# Altium PCB PCB1.PcbDoc
Units mil, origin at the board's own origin, x right, y up, seen from the top; angles counter-clockwise.
Board outline 6000 x 4000 mil, 2 copper layers (Top Layer, Bottom Layer); 29 components, 30 nets, 132 pads, 3 vias.
Unrouted connection lines stored in the file: 6.
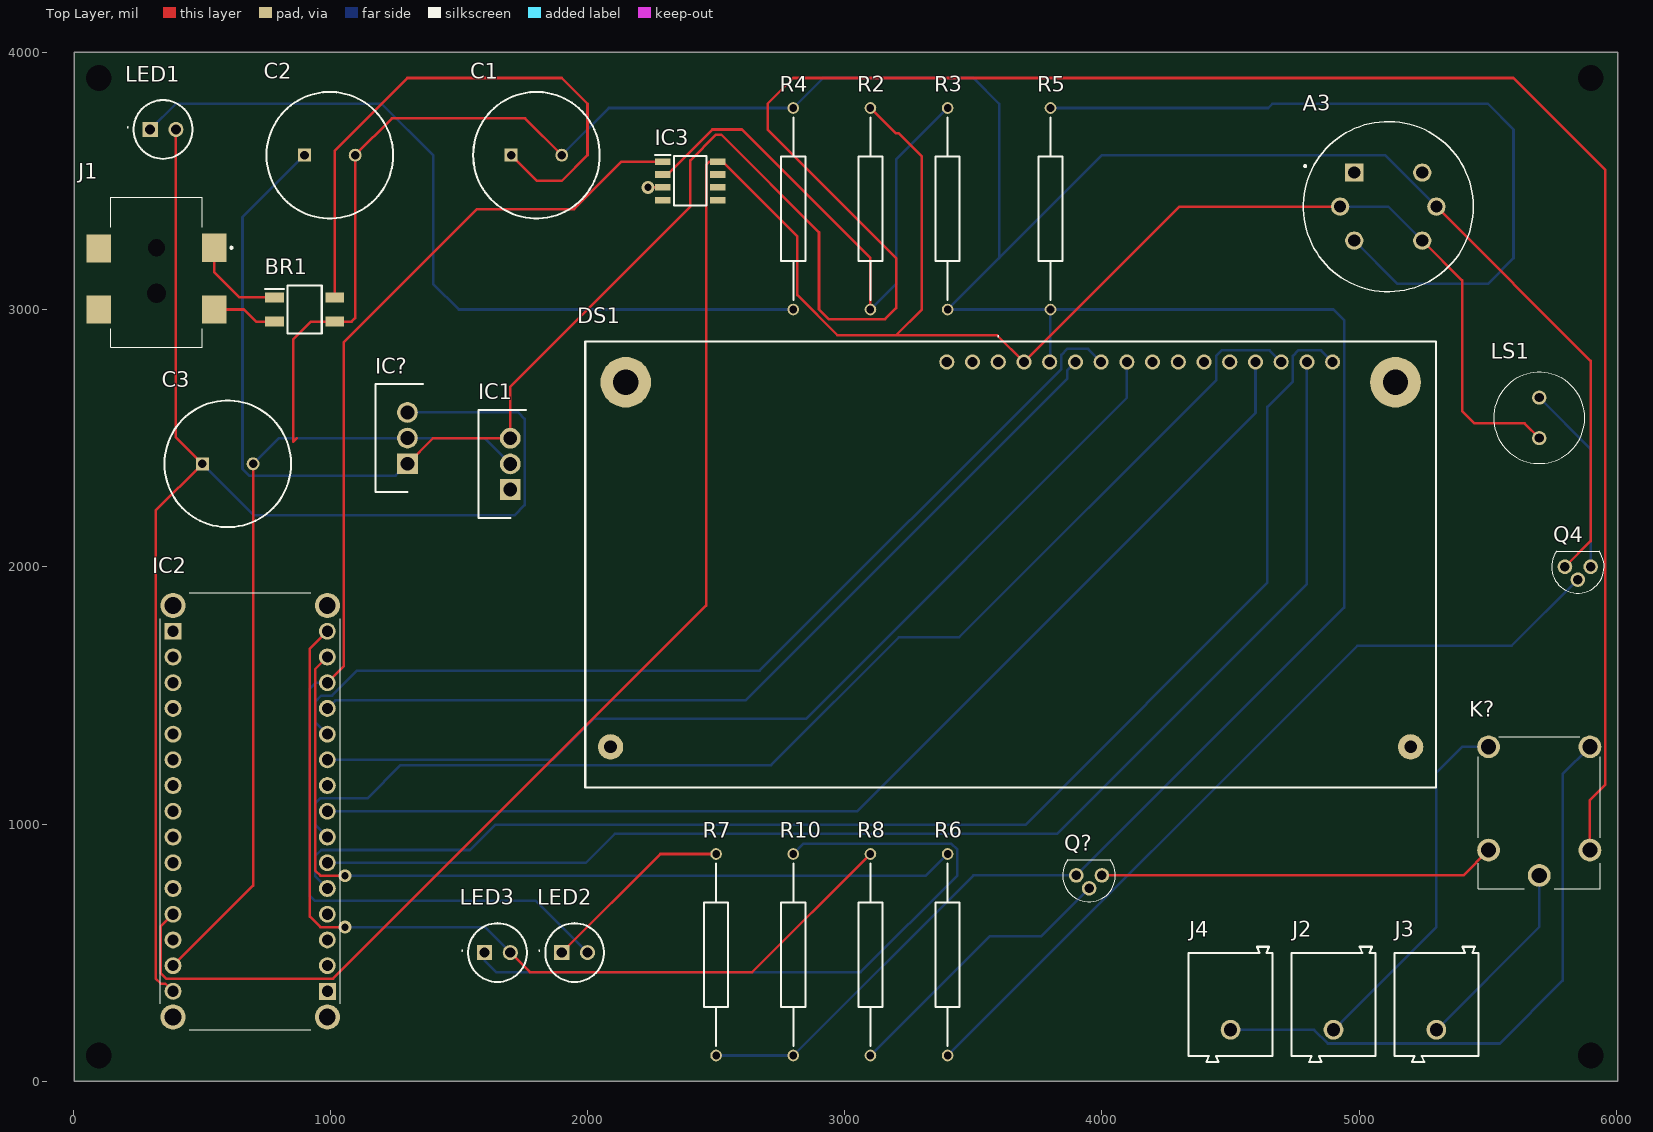
[diagram p0: Top Layer view]
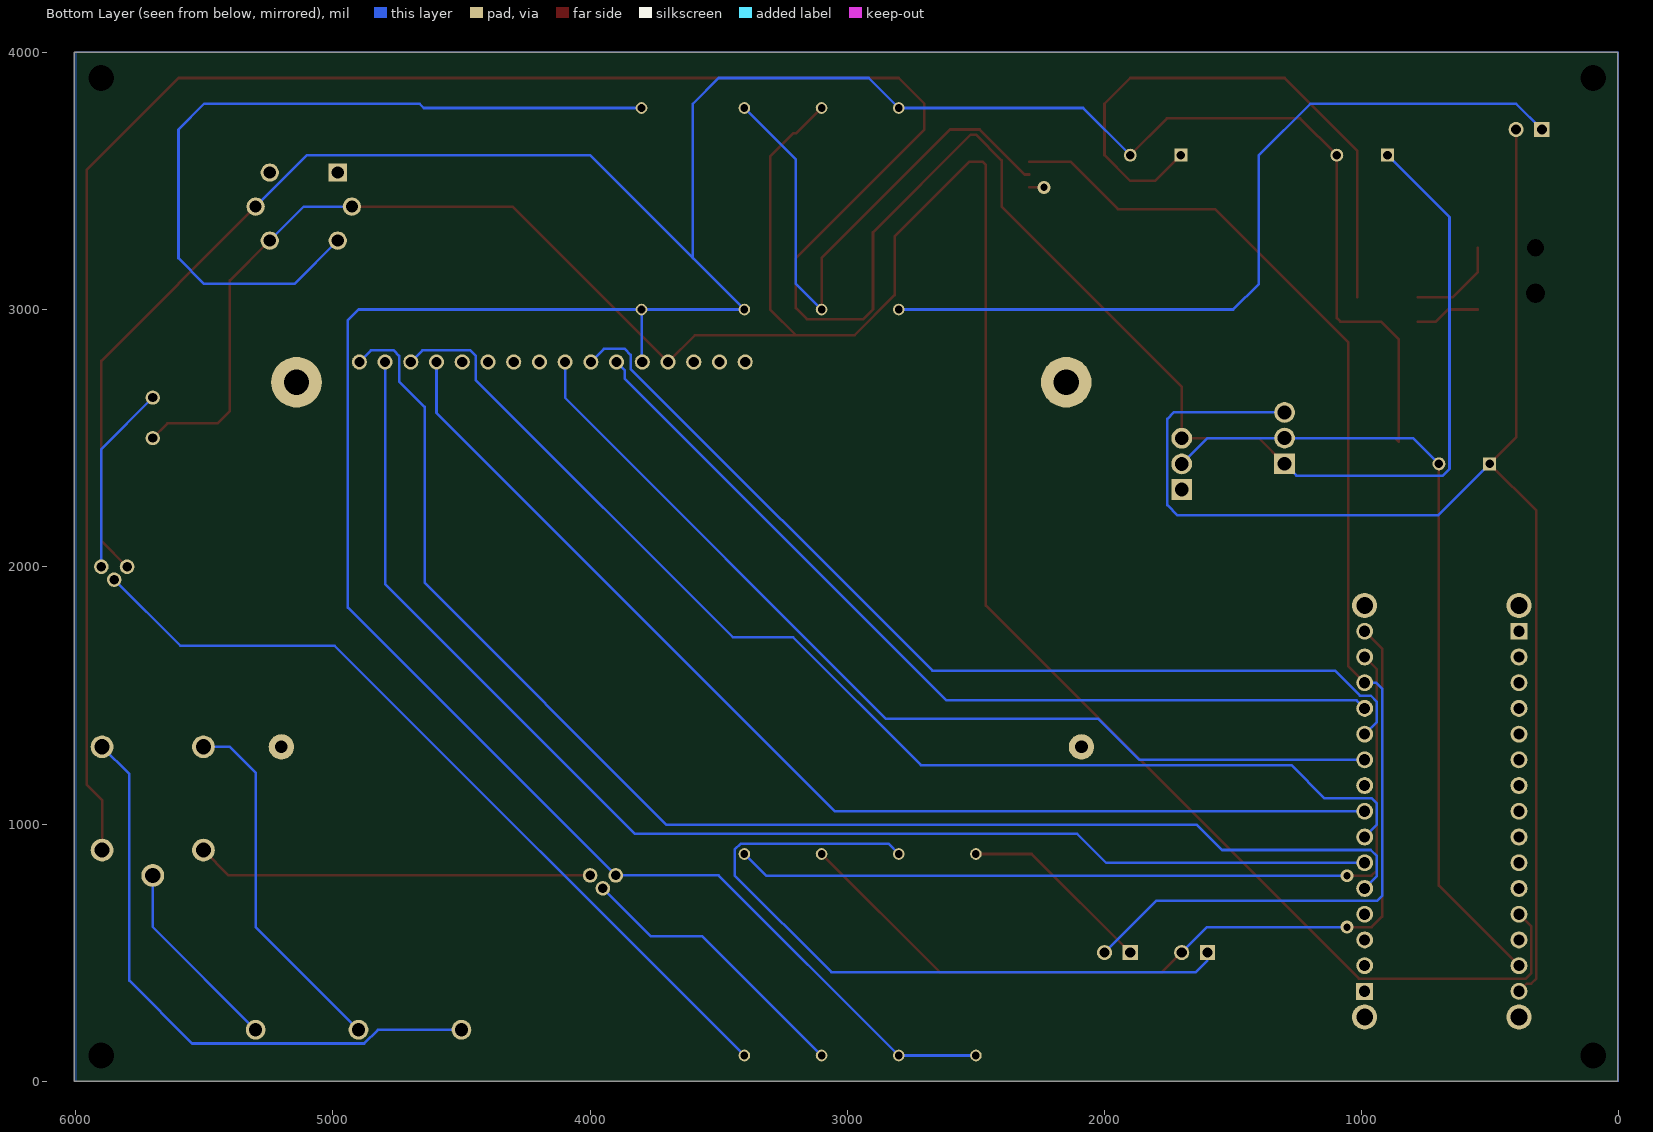
[diagram p1: Bottom Layer view, seen from below]
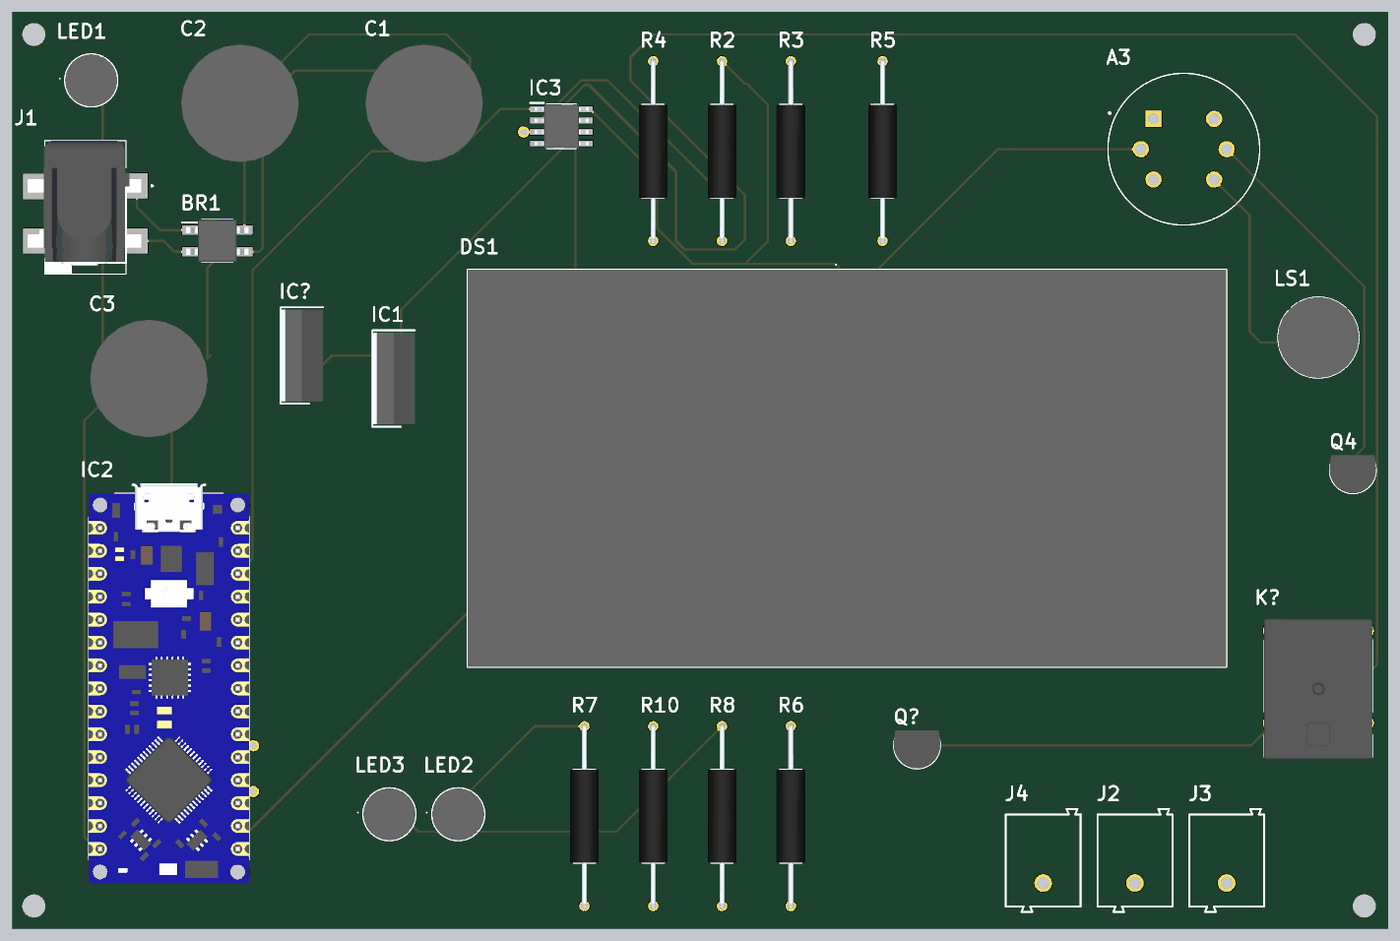
[diagram p2: 3D render of the assembled board from above, using the file's embedded part models]

## Layer stack, top to bottom
Top Solder: solder mask 0.4, Solder Resist, Dk 3.5
Top Layer: signal copper 1.4
Dielectric 1: dielectric 12.6, FR-4, Dk 4.8
Bottom Layer: signal copper 1.4
Bottom Solder: solder mask 0.4, Solder Resist, Dk 3.5

## Board outline
5,0 6005,0 6005,4000 5,4000

## Design rules (kind name [scope] priority, off if disabled: settings)
Clearance [All] p1: gap=10 ignorepadtopadclearanceinfootprint=FALSE except(0: Arc-Hole Track-Hole SMDPad-Hole THPad-Hole Via-Hole Fill-Hole Poly-Hole Region-Hole Text-Hole)
PolygonConnect [All] p1: connectstyle=Relief reliefconductorwidth=10 reliefentries=4 polygonreliefangle="90 Angle" airgapwidth=10
RoutingVias [All] p1: holewidth=28 width=50 viastyle="Through Hole" minholewidth=28 minwidth=50 maxholewidth=28 maxwidth=50
SolderMaskExpansion [All] p1: expansion=4 istentingtop=FALSE
Width [All] p1: maxlimit=10 minlimit=10 preferedwidth=10
30 further rules are at their usual default settings.

## Components (designator, comment, footprint, x,y, rotation, side; value= is the part's Value field where it differs from the comment)
A3 "MQ-7" XDCR_MQ-7 5112.99,3400 r0 top
BR1 "MBS10_RC" SOP240P690X290-4N 900,3000 r0 top
C1 "100uf" CAPPRD500W65D1250H2700 1703.15,3600 r0 top
C2 "100uf" CAPPRD500W65D1250H2700 900,3600 r0 top
C3 "100uf" CAPPRD500W65D1250H2700 503.15,2400 r0 top
DS1 "162H_DC_BW-3LP" 162HDCBW3LP 3596.85,2796.06 r180 top
IC1 "LM7812ACT" TO254P470X1016X2019-3P 1700,2300 r90 top
IC2 "ABX00028" ABX00028 388.86,1749.42 r270 top
IC3 "LM358M" SOIC127P600X175-8N 2400,3500 r0 top
IC? "LM7805ACT" TO254P470X1016X2019-3P 1300,2400.39 r90 top
J1 "PJ-002AH-SMT-1" PJ002AHSMT1 359.84,3145.67 r270 top
J2 "691213810001" 691213810001 4900,200 r90 top
J3 "691213810001" 691213810001 5300,200 r90 top
J4 "691213810001" 691213810001 4500,200 r90 top
K? "JJM1-12V" JJM112V 5896.85,898.43 r90 top
LED1 "151054RS03000" 151054RS03000 300,3700 r0 top
LED2 "151054RS03000" 151054RS03000 1900,500 r0 top
LED3 "151054RS03000" 151054RS03000 1600,500 r0 top
LS1 "CST-951AP" CST951AP 5700,2657.48 r0 top
Q4 "BC547BG" TO-92_(TO-226) 5900,2000 r0 top
Q? "BC547BG" TO-92_(TO-226) 4000,800 r0 top
R2 "1k" RESAD1987W56L1031D239 3100,3000 r90 top
R3 "1k" RESAD1987W56L1031D239 3400,3000 r90 top
R4 "1k" RESAD1987W56L1031D239 2800,3000 r90 top
R5 "10k" RESAD1987W56L1031D239 3800,3000 r90 top
R6 "10k" RESAD1987W56L1031D239 3400,100 r90 top
R7 "1k" RESAD1987W56L1031D239 2500,100 r90 top
R8 "1k" RESAD1987W56L1031D239 3100,100 r90 top
R10 "1k" RESAD1987W56L1031D239 2800,100 r90 top

## Footprints (in the part's own frame and the unit in brackets; to place one, negate y for a bottom-side part, rotate by r counter-clockwise, add the part's x,y. Pads: shape width x height; smd on the part's side, far side on the other; paste and mask are expansions set on the pad)
162HDCBW3LP [mm]
  round 1.5 hole 1: 1(0,0) 2(-2.54,0) 3(-5.08,0) 4(-7.62,0) 5(-10.16,0) 6(-12.7,0) 7(-15.24,0) 8(-17.78,0) 9(-20.32,0) 10(-22.86,0) 11(-25.4,0) 12(-27.94,0) 13(-30.48,0) 14(-33.02,0) 15(5.08,0) 16(2.54,0)
  round 2.5 hole 1.25: MH1(-40.72,38) MH2(38.28,38)
  round 5 hole 2.5: MH3(-39.22,2) MH4(36.78,2)
  silkscreen extent -43.22,-2.6 40.78,42, body extent -43.22,-2 40.78,42, height 13.3
151054RS03000 [mm]
  rect 1.5x1.5 hole 1: 1(0,0)
  round 1.5 hole 1: 2(2.54,0)
  silkscreen extent -2.26,-2.9 4.17,2.9, body extent -1.62,-2.9 4.16,2.9, height 12.2
691213810001 [mm]
  round 1.95 hole 1.3: 1(0,0)
  silkscreen extent -3.2,-4.15 8.2,4.15
ABX00028 [mm]
  rect 1.665x1.665 hole 1.11: A1(0,0) B1(35.56,15.24)
  round 1.665 hole 1.11: A2(2.54,0) A3(5.08,0) A4(7.62,0) A5(10.16,0) A6(12.7,0) A7(15.24,0) A8(17.78,0) A9(20.32,0) A10(22.86,0) A11(25.4,0) A12(27.94,0) A13(30.48,0) A14(33.02,0) A15(35.56,0) B2(33.02,15.24) B3(30.48,15.24) B4(27.94,15.24) B5(25.4,15.24) B6(22.86,15.24) B7(20.32,15.24) B8(17.78,15.24) B9(15.24,15.24) B10(12.7,15.24) B11(10.16,15.24) B12(7.62,15.24) B13(5.08,15.24) B14(2.54,15.24) B15(0,15.24)
  round 2.475 hole 1.65: MH1(-2.54,0) MH2(-2.54,15.24) MH3(38.1,15.24) MH4(38.1,0)
  silkscreen extent -3.81,-1.27 39.37,16.51, body extent -4.94,-1.27 39.39,16.51, height 6
CAPPRD500W65D1250H2700 [mm]
  rect 1.275x1.275 hole 0.85: 1(0,0)
  round 1.275 hole 0.85: 2(5,0)
  silkscreen extent -3.75,-6.25 8.75,6.25, body extent -3.99,-6.5 9,6.5, height 27
CST951AP [mm]
  round 1.4 hole 0.9: 1(0,0) 2(0,-4)
  silkscreen extent -4.5,-6.5 4.5,2.5, body extent -4.5,-6.5 4.5,2.5, height 4.6
JJM112V [mm]
  round 2.25 hole 1.5: 1(0,0) 2(10.2,0) 3(10.2,10) 4(0,10) 5(-2.5,5)
  silkscreen extent -3.8,-1 11.2,11, body extent -3.99,-1 11.51,11, height 12.82
PJ002AHSMT1 [mm]
  rect 2.8x2.4 smd: 1(-2.4,4.8) 2(-2.32,-6.6) 3(3.7,-6.6) 4(3.7,4.8)
  round 0.85 hole 1.7 unplated: 5(-2.4,-0.9)
  round 0.95 hole 1.9 unplated: 6(2.1,-0.9)
  silkscreen extent -7.4,-5.4 7.4,6.6, body extent -7.4,-7.31 7.4,5.29, height 11.21
RESAD1987W56L1031D239 [mm]
  round 1.15 hole 0.75: 1(0,0) 2(19.9,0)
  silkscreen extent 0.92,-1.2 18.97,1.2, body extent -0.28,-1.58 20.15,1.58, height 3.18
SOIC127P600X175-8N [mm]
  rect 1.525x0.65 smd: 1(-2.712,1.905) 2(-2.712,0.635) 3(-2.712,-0.635) 4(-2.712,-1.905) 5(2.712,-1.905) 6(2.712,-0.635) 7(2.712,0.635) 8(2.712,1.905)
  silkscreen extent -3.48,-2.45 1.6,2.58, body extent -3,-2.45 3,2.45, height 1.75
SOP240P690X290-4N [mm]
  rect 1.85x1 smd: 1(-2.975,1.2) 2(-2.975,-1.2) 3(2.975,-1.2) 4(2.975,1.2)
  silkscreen extent -3.9,-2.35 1.7,2.35, body extent -3.45,-2.35 3.45,2.35, height 2.9
TO254P470X1016X2019-3P [mm]
  rect 2.055x2.055 hole 1.37: 1(0,0)
  round 2.055 hole 1.37: 2(2.535,0) 3(5.07,0)
  silkscreen extent -2.8,-1.55 7.87,3.15, body extent -2.55,-1.55 7.61,3.15, height 18.54
TO-92_(TO-226) [mm]
  round 1.44 hole 0.94: 1(0,0) 2(-1.27,-1.27) 3(-2.54,0)
  silkscreen extent -3.87,-2.6 1.33,1.53, body extent -3.87,-2.51 1.33,1.68, height 8.33
XDCR_MQ-7 [mm]
  rect 1.8x1.8 hole 1.2: 1(-3.359,3.359)
  round 1.8 hole 1.2: 2(-4.75,0) 3(-3.359,-3.359) 4(3.359,-3.359) 5(4.75,0) 6(3.359,3.359)
  silkscreen extent -8.4,-8.4 8.4,8.4

## Part data
A3: "Gas Sensor, High sensitivity to carbon monoxide", Package=Package, Availability=Unavailable, Check_prices=https://www.snapeda.com/parts/MQ-7/Hanwei%20Electronics%20Co.,%20Ltd/view-part/5661821/?ref=eda, MF="Hanwei Electronics Co., Ltd", MP=MQ-7, Price=None, SnapEDA_Link=https://www.snapeda.com/parts/MQ-7/Hanwei%20Electronics%20Co.,%20Ltd/view-part/5661821/?ref=snap
BR1: "Bridge Rectifier", Arrow Part Number="MBS10 RC", Manufacturer_Name="Taiwan Semiconductor", Mouser Part Number=N/A, Arrow Price/Stock=https://www.arrow.com/en/products/mbs10rc/taiwan-semiconductor?region=nac, Height=2.9mm, Manufacturer_Part_Number="MBS10 RC", Mouser Price/Stock=https://www.mouser.com/Search/Refine.aspx?Keyword=N%2FA
C1 C2 C3: library part EEUTA1E102LB, "Capacitor Polarised", Manufacturer_Name=Panasonic, Datasheet Link=http://industrial.panasonic.com/cdbs/www-data/pdf/RDF0000/ABA0000C1212.pdf, Height=27mm, Manufacturer_Part_Number=EEUTA1E102LB
DS1: "Display", Manufacturer_Name=Displaytech, Manufacturer_Part_Number="162H DC BW-3LP", Mouser Part Number=758-162HDCBW3LP, Datasheet Link=https://www.mouser.com/datasheet/2/1015/162H-DC-BW-3LP-Displaytech-Spec-1664822.pdf, Height=13.2mm, Mouser Price/Stock=https://www.mouser.co.uk/ProductDetail/Displaytech/162H-DC-BW-3LP?qs=PzGy0jfpSMu9Pu07wP3dWg%3D%3D
IC1: "Integrated Circuit", Manufacturer_Name=onsemi, Mouser Part Number=512-LM7812ACT, Arrow Part Number=LM7812ACT, Arrow Price/Stock=https://www.arrow.com/en/products/lm7812act/on-semiconductor, Datasheet Link=https://datasheet.datasheetarchive.com/originals/distributors/Datasheets_SAMA/704b005d7d2d9ced5864f40b6609c1bc.pdf, Height=4.7mm, Manufacturer_Part_Number=LM7812ACT, Mouser Price/Stock=https://www.mouser.com/Search/Refine.aspx?Keyword=512-LM7812ACT
IC2: "Integrated Circuit", Manufacturer_Name=Arduino, Mouser Part Number=782-ABX00028, Arrow Part Number=ABX00028, Arrow Price/Stock=https://www.arrow.com/en/products/abx00028/arduino-corporation?region=nac, Datasheet Link=https://store.arduino.cc/arduino-nano-every, Height=10mm, Manufacturer_Part_Number=ABX00028, Mouser Price/Stock=https://www.mouser.co.uk/ProductDetail/Arduino/ABX00028?qs=PzGy0jfpSMtit6rnFl8mVg%3D%3D
IC3: "Integrated Circuit", Manufacturer_Name=onsemi, Mouser Part Number=512-LM358M, Arrow Part Number=LM358M, Arrow Price/Stock=https://www.arrow.com/en/products/lm358m/on-semiconductor, Datasheet Link=https://www.onsemi.com/pub/Collateral/LM358A-D.pdf, Height=1.75mm, Manufacturer_Part_Number=LM358M, Mouser Price/Stock=https://www.mouser.co.uk/ProductDetail/onsemi-Fairchild/LM358M?qs=M37yUtvuNLzx7IpRziQN1g%3D%3D
IC?: "Integrated Circuit", Manufacturer_Name=onsemi, Mouser Part Number=512-LM7805ACT, Arrow Part Number=LM7805ACT, Arrow Price/Stock=https://www.arrow.com/en/products/lm7805act/on-semiconductor, Datasheet Link=https://componentsearchengine.com/Datasheets/2/LM7805ACT.pdf, Height=4.7mm, Manufacturer_Part_Number=LM7805ACT, Mouser Price/Stock=https://www.mouser.co.uk/ProductDetail/ON-Semiconductor-Fairchild/LM7805ACT?qs=VOMQJJE%252BBNlQknJDd4ZVLg%3D%3D
J1: "Connector", Manufacturer_Name="CUI Devices", Mouser Part Number=N/A, Datasheet Link=https://www.cui.com/product/resource/pj-002ah-smt-tr.pdf, Height=11mm, Manufacturer_Part_Number=PJ-002AH-SMT-1, Mouser Price/Stock=https://www.mouser.co.uk/ProductDetail/CUI-Inc/PJ-002AH-SMT-1/?qs=WyjlAZoYn53v8l9vpJCO1Q%3D%3D
J2 J3 J4: "1 Position Wire to Board Terminal Block Horizontal with Board - Through Hole", Package=None, Check_prices=https://www.snapeda.com/parts/691213810001/Wurth+Electronics+Inc./view-part/?ref=eda, MF="WÃ¼rth Elektronik", MP=691213810001, SnapEDA_Link=https://www.snapeda.com/parts/691213810001/Wurth+Electronics+Inc./view-part/?ref=snap
K?: "Relay or Contactor", Manufacturer_Name=Panasonic, Mouser Part Number=769-JJM1-12V, Arrow Part Number=JJM1-12V, Arrow Price/Stock=https://www.arrow.com/en/products/jjm1-12v/panasonic?region=nac, Datasheet Link=https://www.panasonic-electric-works.com/cps/rde/xbcr/pew_eu_en/ds_61210_en_jjm.pdf, Height=14.2mm, Manufacturer_Part_Number=JJM1-12V, Mouser Price/Stock=https://www.mouser.co.uk/ProductDetail/Panasonic-Industrial-Devices/JJM1-12V?qs=UO%2Fx91QLkSB08I34A9%2FECg%3D%3D
LED1 LED2 LED3: "LED", Manufacturer_Name="Wurth Elektronik", Mouser Part Number=710-151054RS03000, Datasheet Link=https://componentsearchengine.com/Datasheets/1/151054RS03000.pdf, Height=12.1mm, Manufacturer_Part_Number=151054RS03000, Mouser Price/Stock=https://www.mouser.com/Search/Refine.aspx?Keyword=710-151054RS03000
LS1: "Loudspeaker or Buzzer", Manufacturer_Name="CUI Devices", Mouser Part Number=490-CST-951AP, Arrow Part Number=CST-951AP, Arrow Price/Stock=https://www.arrow.com/en/products/cst-951ap/cui-devices?region=nac, Datasheet Link=https://datasheet.datasheetarchive.com/originals/distributors/Datasheets-45/DSA-14132.pdf, Height=4.5mm, Manufacturer_Part_Number=CST-951AP, Mouser Price/Stock=https://www.mouser.co.uk/ProductDetail/CUI-Devices/CST-951AP?qs=WyjlAZoYn50BV9%2FINsWxoA%3D%3D
Q4 Q?: "Transistor BJT NPN", Manufacturer_Name=onsemi, Mouser Part Number=N/A, Arrow Part Number=BC547BG, Arrow Price/Stock=http://www.arrow.com/en/products/bc547bg/on-semiconductor, Datasheet Link=https://datasheet.datasheetarchive.com/originals/distributors/Datasheets-23/DSA-455923.pdf, Height=5.33mm, Manufacturer_Part_Number=BC547BG, Mouser Price/Stock=http://www.mouser.com/Search/ProductDetail.aspx?qs=NSmgnqlvnz5NIKIycfR5CQ%3d%3d
R2 R3 R4 R5 R6 R7 R8 R10: library part RS01A1R000FE12, "Resistor", Manufacturer_Name=Vishay, Mouser Part Number=71-RS01A1R000FE12, Arrow Part Number=RS01A1R000FE12, Arrow Price/Stock=https://www.arrow.com/en/products/rs01a1r000fe12/vishay?region=nac, Datasheet Link=http://www.mouser.com/ds/2/427/rsns-226497.pdf, Manufacturer_Part_Number=RS01A1R000FE12, Mouser Price/Stock=https://www.mouser.co.uk/ProductDetail/Vishay-Dale/RS01A1R000FE12?qs=pX8%252BLszEE6SqU%2F4VU%252B6gEw%3D%3D

## Free pads (board coordinates)
  round 60 hole 100: 1(5900,3900) 2(100,3900) 3(100,100) 4(5900,100)

## Via types
v1: diameter 50, hole 28, Top Layer to Bottom Layer, 3 vias

## Nets (pads, with @x,y where several pads share a name; then routed paths per layer and width w, separated by ;. In a path a pad name is that pad's centre, name@x,y a point inside that pad or via, vN(x,y) a via of type N, cw(c..) or ccw(c..) an arc to the next point about the centre after c; other vN are vias at no path point)
GND: A3.5 BR1.3 C1.2 C2.2 C3.2 DS1.1 DS1.3 IC1.2 IC2.A14 IC3.4 IC?.2 Q4.3 Q?.3 R3.1 R4.2 R5.1 R7.1 R10.1 | length 17838.4
  Top Layer w10: IC2.A14 700,760.56 C3.2 ; 870.2,2500.2 857,2487 857,2884.76 925,2952.76 BR1.3 1083,2952.76 1096.85,2966.61 C2.2 1239.85,3743 1757,3743 C1.2 ; A3.5 5900,2800 5900,2100 Q4.3
  Bottom Layer w10: C3.2 800.2,2500.2 IC?.2 1599.61,2500.2 IC1.2 ; C1.2 2083.46,3783.46 R4.2 2916.54,3900 3500,3900 3600,3800 3600,3200 ; R7.1 R10.1 3500,800 Q?.3 4941.38,1841.38 4941.38,2958.62 4900,3000 R5.1 ; DS1.3 3798.43,2797.64 3798.43,2998.43 R5.1 ; A3.5 5100,3600 4000,3600 3600,3200 ; 3600,3200 R3.1 R5.1
NetA3_1: A3.1 IC3.3 | length 58.2
  Top Layer w10: v1(2235,3475) IC3.3
NetA3_2: A3.2 A3.4 A3.6 DS1.2 IC2.A12 IC3.8 LS1.2 R2.2 | length 10325.1
  Top Layer w10: IC2.A12 341,601.56 341,420 362,399 1011,399 2461,1849 2461,3561 2475,3575 IC3.8 2524,3575 2815.9,3283.1 2815.9,3055.82 2971.72,2900 3200,2900 ; R2.2 3198.04,3685.43 3208.71,3685.43 3300,3594.14 3300,3000 3200,2900 ; A3.2 4300.79,3400 DS1.2 3592.91,2900 3200,2900 ; A3.4 5400,3112.99 5400,2605.86 5448.61,2557.25 5642.75,2557.25 LS1.2
  Bottom Layer w10: A3.2 5112.99,3400 A3.4
NetA3_3: A3.3 R5.2 | length 3078.4
  Bottom Layer w10: R5.2 4646.5,3783.46 4663.04,3800 5500,3800 5600,3700 5600,3200 5500,3100 5148.52,3100 A3.3
NetBR1_1: BR1.1 J1.1 | length 368.9
  Top Layer w10: J1.1 548.82,3146.42 648,3047.24 BR1.1
NetBR1_2: BR1.2 J1.4 | length 253.6
  Top Layer w10: J1.4 664.76,3000 712,2952.76 BR1.2
NetBR1_4: BR1.4 C1.1 IC1.1 | length 2291
  Top Layer w10: BR1.4 1017.13,3617.13 1300,3900 1900,3900 2000,3800 2000,3600 1900,3500 1803.15,3500 C1.1
NetC2_1: C2.1 IC1.3 IC?.1 K?.1 | length 12254.5
  Top Layer w10: IC?.1 1399.21,2499.61 IC1.3 1700,2700 2400,3400 2400,3580 2500,3680 2520,3680 2900,3300 2900,3000 2937.64,2962.36 3156.5,2962.36 3200,3005.86 3200,3200 2700,3700 2700,3800 2800,3900 5600,3900 5956.14,3543.86 5956.14,1151.77 5896.85,1092.48 5896.85,903.15 5900,900 5898.43,898.43 K?.1
  Bottom Layer w10: C2.1 659,3359 659,2380 685,2354 1253.61,2354 IC?.1
NetC3_1: C3.1 IC2.A15 IC?.3 LED1.2 | length 5660.6
  Top Layer w10: IC2.A15 359.28,379 342,379 321,400 321,2217.85 C3.1 400,2503.15 LED1.2
  Bottom Layer w10: C3.1 703.15,2200 1716,2200 1756,2240 1756,2575 1731,2600 IC?.3
NetDS1_4: DS1.4 IC2.B12 | length 3484.6
  Bottom Layer w10: IC2.B12 1020.44,1481 2613.97,1481 3865.29,2732.32 3865.29,2764.51 DS1.4
NetDS1_5: DS1.5 IC2.B11 | length 3822.9
  Bottom Layer w10: IC2.B11 941,1397.28 941,1475 965,1499 1007,1499 1104,1596 2669,1596 3842,2769 3842,2824 3865,2847 3945.91,2847 DS1.5
NetDS1_6: DS1.6 IC2.B10 | length 3830.1
  Bottom Layer w10: IC2.B10 1864.42,1249.42 2024,1409 2848.85,1409 4096.85,2657 DS1.6
NetDS1_11: DS1.11 IC2.B8 | length 4447.6
  Bottom Layer w10: IC2.B8 3048.42,1049.42 4596.85,2597.85 DS1.11
NetDS1_12: DS1.12 IC2.B7 | length 4709.9
  Bottom Layer w10: IC2.B7 941,997.28 941,1080 961,1100 1145,1100 1274,1229 2714,1229 3211,1726 3445,1726 4445,2726 4445,2821 4465,2841 4651.91,2841 DS1.12
NetDS1_13: DS1.13 IC2.B6 | length 5119.8
  Bottom Layer w10: IC2.B6 1993.42,849.42 2106,962 3825.68,962 4796.85,1933.17 DS1.13
NetDS1_14: DS1.14 IC2.B5 | length 5392.9
  Bottom Layer w10: IC2.B5 941,797.28 941,875 965,899 1543,899 1641,997 3702,997 4643,1938 4643,2621 4742,2720 4742,2820 4763,2841 4851.91,2841 DS1.14
NetIC2_B13: IC2.B13 IC3.1 LED2.2 | length 4934.3
  Top Layer w10: IC2.B13 1053,1613.56 1053,2873 1570,3390 1948.1,3390 2133.1,3575 IC3.1
  Bottom Layer w10: IC2.B13 944.42,1549.42 921,1526 921,721 941,701 1799,701 LED2.2
NetIC2_B14: IC2.B14 R6.2 | length 3351.9
  Top Layer w10: IC2.B14 941,1601.56 941,820 962,799 v1(1057,799)
  Bottom Layer w10: v1(1057,799) 3315.54,799 R6.2
NetIC2_B15: IC2.B15 LED3.2 R8.2 | length 3596.3
  Top Layer w10: IC2.B15 921,1681.56 921,640 962,599 v1(1057,599) ; LED3.2 1776,424 2640.54,424 R8.2
  Bottom Layer w10: v1(1057,599) 1601,599 LED3.2
NetIC3_2: IC3.2 R2.1 R3.2 | length 2194.1
  Top Layer w10: IC3.2 2310.45,3525 2485.45,3700 2600,3700 3100,3200 R2.1
  Bottom Layer w10: R2.1 3200,3100 3200,3583.46 R3.2
NetJ2_1: J2.1 K?.3 | length 1410.3
  Bottom Layer w10: J2.1 5300,600 5300,1200 5400,1300 K?.3
NetJ3_1: J3.1 K?.5 | length 765.7
  Bottom Layer w10: J3.1 5700,600 K?.5
NetJ4_1: J4.1 K?.2 | length 2367.2
  Bottom Layer w10: J4.1 4824.5,200 4877.89,146.61 5546.61,146.61 5790.91,390.91 5790.91,1194.06 K?.2
NetK?_4: K?.4 Q?.1 | length 1543.9
  Top Layer w10: Q?.1 5404.72,800 K?.4
NetLED1_1: LED1.1 R4.1 | length 3165.7
  Bottom Layer w10: LED1.1 400,3800 1200,3800 1400,3600 1400,3100 1500,3000 R4.1
NetLED2_1: LED2.1 R7.2 | length 758.8
  Top Layer w10: LED2.1 2283.46,883.46 R7.2
NetLED3_1: LED3.1 R10.2 | length 2808.1
  Bottom Layer w10: LED3.1 1600,469 1645,424 3062,424 3438,800 3438,900 3414,924 2840.54,924 R10.2
NetLS1_1: LS1.1 Q4.1 | length 740.3
  Bottom Layer w10: LS1.1 5900,2457.48 Q4.1
NetQ4_2: Q4.2 R6.1 | length 3216.3
  Bottom Layer w10: R6.1 4993,1693 5593,1693 Q4.2
NetQ?_2: Q?.2 R8.1 | length 1119.2
  Bottom Layer w10: R8.1 3563,563 3763,563 Q?.2
pads on no net: DS1.7 DS1.8 DS1.9 DS1.10 DS1.15 DS1.16 DS1.MH1 DS1.MH2 DS1.MH3 DS1.MH4 IC2.A1 IC2.A2 IC2.A3 IC2.A4 IC2.A5 IC2.A6 IC2.A7 IC2.A8 IC2.A9 IC2.A10 IC2.A11 IC2.A13 IC2.B1 IC2.B2 IC2.B3 IC2.B4 IC2.B9 IC2.MH1 IC2.MH2 IC2.MH3 IC2.MH4 IC3.5 IC3.6 IC3.7 J1.2 J1.3 J1.5 J1.6

## Polygon pours and split planes (outlines as drawn)
no net on Multi-Layer (solid, shelved): 100,2800 1800,2800 1800,100 100,100
GND on Bottom Layer "GND_L02_P003" (solid, pour order 3): 0,4000 6000,4000 6000,0 0,0

## Dimensions
6300,4000 to 6200,0 on Bottom Layer
0,-200 to 6000,-100 on Bottom Layer